# EAGLE board Daughter2 routed (EAGLE 9.6.2)
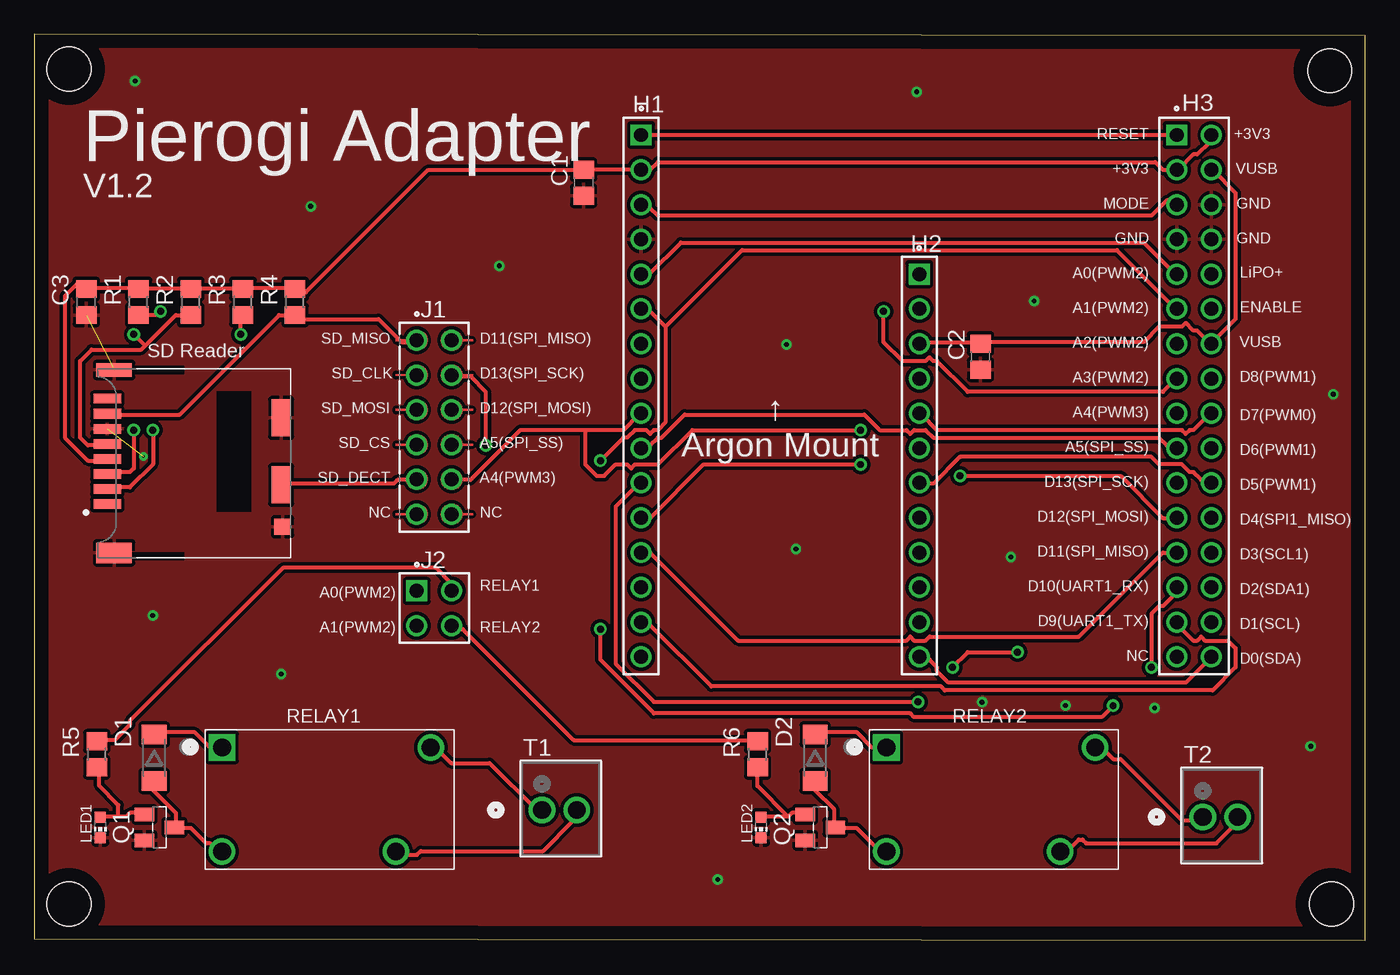
[diagram p0: board, top side]
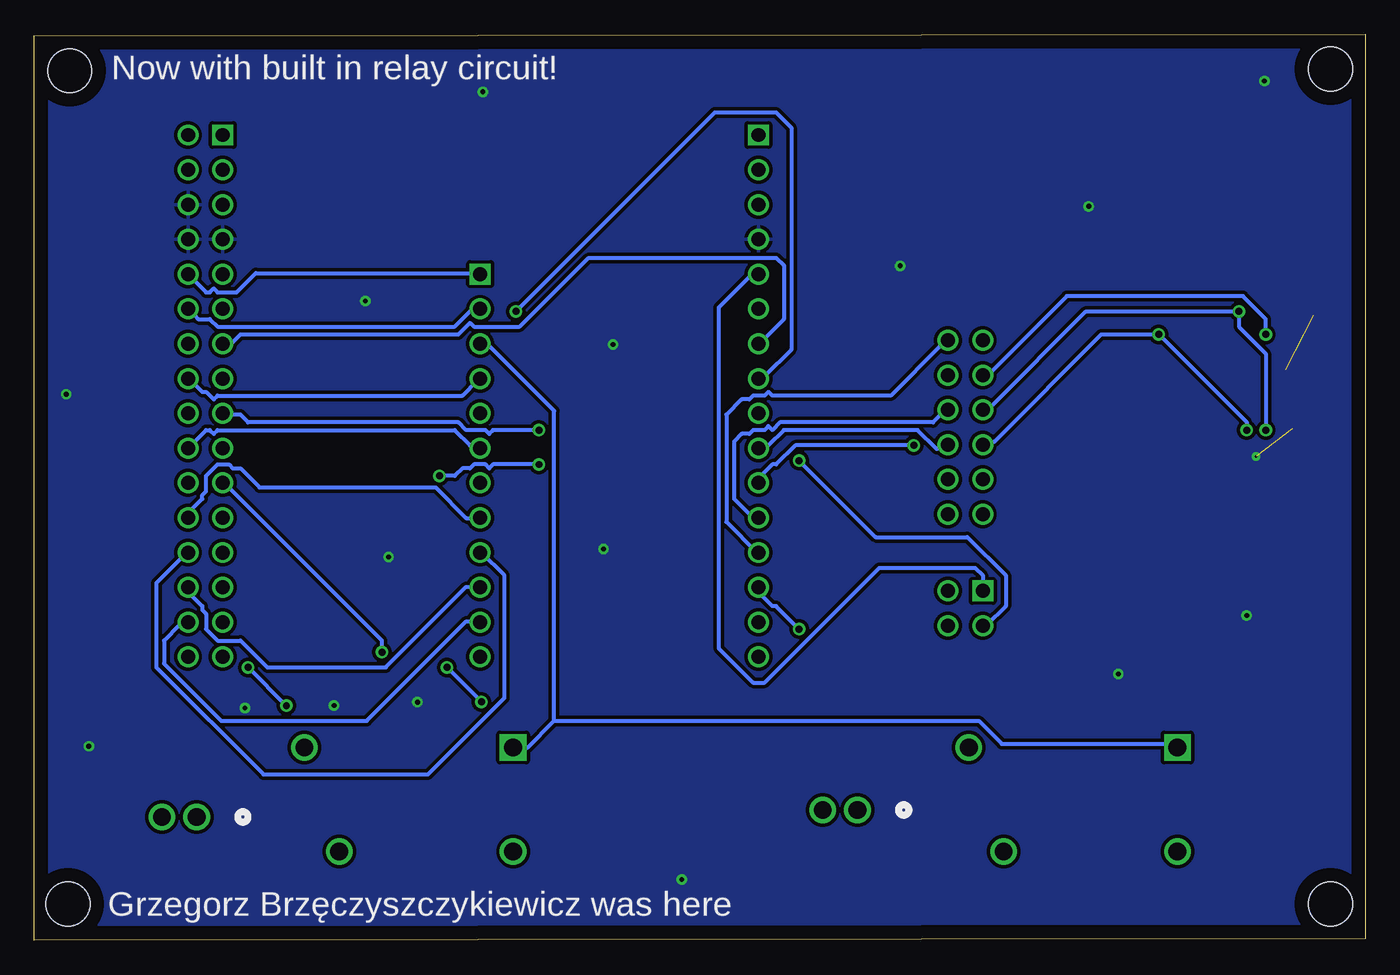
[diagram p1: board, bottom side, seen from below]

Size 97.21 x 66.16 mm. Coordinates in mm from the lower left corner, seen from the top.
Outline: 0,0.13 97.21,0 97.21,66.03 0,66.16 0,0.13
Copper layers (1*16): Top 0.035mm / dielectric 1.5mm / Bottom 0.035mm
Design rules "default": minimum track width 6mil, minimum drill 0.35mm, track to track 6mil, track to pad 6mil, pad to pad 6mil, via to via 6mil, smd to smd 6mil, copper to edge 40mil, drill to drill 6mil, minimum pad ring 10mil, minimum via ring 8mil, stop-mask expansion 4mil, vias tented up to drill 0mil, thermal gap 10mil
Net classes: 0 default: width 0.305 mm, drill 0.508 mm, clearance 0.254 mm
Holes 3.2 mm at 2.54,63.63 94.61,63.5 2.54,2.67 94.74,2.67

## Footprints (pad centres in the part's own frame; a part is rotated, then mirrored left to right if it is on the bottom)
C0805 = smd 1.3 x 1.5: 1 -0.95,0; 2 0.95,0
SOD80 = smd 1.4 x 1.8: 1 -1.7,0; 2 1.7,0
SAMTEC_DW-16-09-T-S-437-LL = drill 1.02 pad 1.37 square: 01 0,0 | drill 1.02 pad 1.37: 02 2.54,0; 03 5.08,0; 04 7.62,0; 05 10.16,0; 06 12.7,0; 07 15.24,0; 08 17.78,0; 09 20.32,0; 10 22.86,0; 11 25.4,0; 12 27.94,0; 13 30.48,0; 14 33.02,0; 15 35.56,0; 16 38.1,0
SAMTEC_DW-12-13-T-S-827 = drill 1.02 pad 1.37 square: 01 0,0 | drill 1.02 pad 1.37: 02 2.54,0; 03 5.08,0; 04 7.62,0; 05 10.16,0; 06 12.7,0; 07 15.24,0; 08 17.78,0; 09 20.32,0; 10 22.86,0; 11 25.4,0; 12 27.94,0
SAMTEC_ZW-16-07-T-D-200-100 = drill 1.02 pad 1.37 square: 01 0,0 | drill 1.02 pad 1.37: 02 0,2.54; 03 2.54,0; 04 2.54,2.54; 05 5.08,0; 06 5.08,2.54; 07 7.62,0; 08 7.62,2.54; 09 10.16,0; 10 10.16,2.54; 11 12.7,0; 12 12.7,2.54; 13 15.24,0; 14 15.24,2.54; 15 17.78,0; 16 17.78,2.54; 17 20.32,0; 18 20.32,2.54; 19 22.86,0; 20 22.86,2.54; 21 25.4,0; 22 25.4,2.54; 23 27.94,0; 24 27.94,2.54; 25 30.48,0; 26 30.48,2.54; 27 33.02,0; 28 33.02,2.54; 29 35.56,0; 30 35.56,2.54; 31 38.1,0; 32 38.1,2.54
SAMTEC_MTLW-106-22-G-D-380 = drill 1.02 pad 1.52: 01 -6.35,-1.27; 02 -6.35,1.27; 03 -3.81,-1.27; 04 -3.81,1.27; 05 -1.27,-1.27; 06 -1.27,1.27; 07 1.27,-1.27; 08 1.27,1.27; 09 3.81,-1.27; 10 3.81,1.27; 11 6.35,-1.27; 12 6.35,1.27
SAMTEC_MTSW-102-06-G-D-100 = drill 1.02 pad 1.37 square: 01 0,0 | drill 1.02 pad 1.37: 02 0,2.54; 03 2.54,0; 04 2.54,2.54
RELAY_OJE-SS-124HM,000 = drill 1.3 square: 1 -7.62,3.8 | drill 1.3: 2 7.62,3.8; 3 5.08,-3.8; 4 -7.62,-3.8
CHIP-LED0603 = smd 0.8 x 0.8: A 0,-0.75; C 0,0.75
SOT-23_BEC = smd 1 x 1.4: B -0.95,-1.1; C 0,1.1; E 0.95,-1.1
R0805 = smd 1.3 x 1.5: 1 -0.95,0; 2 0.95,0
HRS_DM3CS-SF = smd 0.7 x 2: 1 3.2,-6.35; 2 2.1,-6.35; 3 1,-6.35; 4 -0.1,-6.35; 5 -1.2,-6.35; 6 -2.3,-6.35; 7 -3.4,-6.35; 8 -4.5,-6.35 | smd 2.7 x 1.4: 9 1.8,6.35; S3 -3.1,6.35 | smd 1 x 2.6: S1 -6.6,-5.85 | smd 1.5 x 2.6: S2 6.75,-5.85 | smd 1.2 x 1.2: S5 4.85,6.45
CONN_OSTVN02A150_OST = drill 1.295 pad 1.803: 1 0,0; 2 2.54,0

## Placement (x,y rotation side)
C1  .1uF  [C0805]  40.13,55.32 270 top
C2  .1uF  [C0805]  69.11,42.62 270 top
C3  .1uF  [C0805]  3.81,46.61 270 top
D1  [SOD80]  8.76,13.34 270 top
D2  [SOD80]  57.02,13.34 270 top
H1  DW-16-09-T-S-437-LL  [SAMTEC_DW-16-09-T-S-437-LL]  44.32,58.8 270 top
H2  DW-12-13-T-S-827  [SAMTEC_DW-12-13-T-S-827]  64.64,48.64 270 top
H3  ZW-16-07-T-D-200-100  [SAMTEC_ZW-16-07-T-D-200-100]  83.44,58.8 270 top
J1  MTLW-106-22-G-D-380  [SAMTEC_MTLW-106-22-G-D-380]  29.21,37.47 270 top
J2  MTSW-102-06-G-D-100  [SAMTEC_MTSW-102-06-G-D-100]  27.94,25.53 270 top
K1  OJE-SS-124HM,000  [RELAY_OJE-SS-124HM,000]  21.34,10.29 0 top
K2  OJE-SS-124HM,000  [RELAY_OJE-SS-124HM,000]  69.85,10.29 0 top
LED1  [CHIP-LED0603]  4.83,8.26 180 top
LED2  [CHIP-LED0603]  53.09,8.26 180 top
Q1  SS8050  [SOT-23_BEC]  9.14,8.26 270 top
Q2  SS8050  [SOT-23_BEC]  57.4,8.26 270 top
R1  10K  [R0805]  7.62,46.61 90 top
R2  10K  [R0805]  11.43,46.61 90 top
R3  10K  [R0805]  15.24,46.61 90 top
R4  10K  [R0805]  19.05,46.61 90 top
R5  1K  [R0805]  4.57,13.59 90 top
R6  1K  [R0805]  52.83,13.59 90 top
SD1  DM3CS-SF  [HRS_DM3CS-SF]  11.68,35.05 270 top
T1  OSTVN02A150  [CONN_OSTVN02A150_OST]  37.08,9.53 0 top
T2  OSTVN02A150  [CONN_OSTVN02A150_OST]  85.34,9.02 0 top

## Library data of the parts
C1-C3 = rcl; SPICEPREFIX: C
D1 D2 = semicon-smd-ipc
H1 = DW-16-09-T-S-437-LL; AVAILABILITY: In Stock; DESCRIPTION: 16 Position Header Spacer Connector 0.100 (2.54mm) Tin Through Hole; MF: Samtec; MP: DW-16-09-T-S-437-LL; PACKAGE: None; PRICE: None; PURCHASE-URL: https://pricing.snapeda.com/search/part/DW-16-09-T-S-437-LL/?ref=eda
H2 = DW-12-13-T-S-827; AVAILABILITY: In Stock; DESCRIPTION: 12 Position Header Spacer Connector 0.100 (2.54mm) Tin Through Hole; MF: Samtec Inc.; MP: DW-12-13-T-S-827; PACKAGE: None; PRICE: None; PURCHASE-URL: https://pricing.snapeda.com/search/part/DW-12-13-T-S-827/?ref=eda
H3 = ZW-16-07-T-D-200-100; AVAILABILITY: In Stock; DESCRIPTION: 32 Position Header Spacer Connector 0.100 (2.54mm) Tin Through Hole; MF: Samtec Inc.; MP: ZW-16-07-T-D-200-100; PACKAGE: None; PRICE: None; PURCHASE-URL: https://pricing.snapeda.com/search/part/ZW-16-07-T-D-200-100/?ref=eda
J1 = MTLW-106-22-G-D-380; AVAILABILITY: In Stock; DESCRIPTION: CONN HEADER VERT 12POS 2.54MM; MF: Samtec; MP: MTLW-106-22-G-D-380; PACKAGE: None; PRICE: None; PURCHASE-URL: https://pricing.snapeda.com/search/part/MTLW-106-22-G-D-380/?ref=eda
J2 = MTSW-102-06-G-D-100; AVAILABILITY: In Stock; DESCRIPTION: Connector Header Through Hole 4 position 0.100 (2.54mm); MF: Samtec Inc.; MP: MTSW-102-06-G-D-100; PACKAGE: None; PRICE: None; PURCHASE-URL: https://pricing.snapeda.com/search/part/MTSW-102-06-G-D-100/?ref=eda
K1 K2 = OJE-SS-124HM_000; AVAILABILITY: In Stock; COMMENT: 6-1419128-4; DESCRIPTION: Electromechanical Relay 24VDC 1.28KOhm 10A SPST-NO( (18.2mm 10.2mm 14.7mm)) THT Miniature Relay; MF: TE Connectivity; MP: OJE-SS-124HM,000; PACKAGE: None; PRICE: None; PURCHASE-URL: https://pricing.snapeda.com/search/part/OJE-SS-124HM,000/?ref=eda
LED1 LED2 = led
Q1 Q2 = SS8050; AVAILABILITY: In Stock; DESCRIPTION: Bipolar (BJT) Transistor NPN 25V 1.5A 100MHz 625mW Surface Mount SOT-23; MF: Microdiode Electronics; MP: SS8050; PACKAGE: TO-236-3 Microdiode Electronics; PRICE: None; PURCHASE-URL: https://pricing.snapeda.com/search/part/SS8050/?ref=eda
R1-R6 = rcl; SPICEPREFIX: R
SD1 = DM3CS-SF; AVAILABILITY: In Stock; DESCRIPTION: 10 (8 + 2) Position Card Connector Secure Digital - microSD™ Surface Mount, Right Angle Gold; MF: Hirose; MP: DM3CS-SF; PACKAGE: None; PRICE: None; PURCHASE-URL: https://pricing.snapeda.com/search/part/DM3CS-SF/?ref=eda
T1 T2 = OSTVN02A150; COPYRIGHT: Copyright (C) 2022 Ultra Librarian. All rights reserved.; MANUFACTURER_PART_NUMBER: OSTVN02A150; MFR_NAME: On Shore Technology

## Nets
+3V3: C1.1 C3.1 H1.02 H3.02 H3.03 R1.2 R2.2 R3.2 R4.2 SD1.4
A0(PWM2): H1.05 H3.09 J2.01
A1(PWM2): H1.06 H3.11 J2.03
A2(PWM2): H1.07 H3.13
A3(PWM2): H1.08 H3.15
A4(PWM3): H1.09 H3.17 J1.10
A5(SPI_SS): H1.10 H3.19 J1.08
D0(SDA): H2.12 H3.32
D1(SCL): H2.11 H3.30
D2(SDA1): H2.10 H3.28
D3(SCL1): H2.09 H3.26
D4(SPI1_MISO): H2.08 H3.24
D5(PWM1): H2.07 H3.22
D6(PWM1): H2.06 H3.20
D7(PWM0): H2.05 H3.18
D8(PWM1): H2.04 H3.16
D9(UART1_TX): H1.15 H3.29
D10(UART1_RX): H1.14 H3.27
D11(SPI_MISO): H1.13 H3.25 J1.02
D12(SPI_MOSI): H1.12 H3.23 J1.06
D13(SPI_SCK): H1.11 H3.21 J1.04
ENABLE: H2.02 H3.12
GND: C1.2 C2.2 C3.2 H1.04 H3.06 H3.07 H3.08 LED1.C LED2.C Q1.E Q2.E SD1.6 SD1.S1 SD1.S2 SD1.S3 SD1.S5
LIPO+: H2.01 H3.10
MODE: H1.03 H3.05
RELAY1IN: J2.02 R5.2
RELAY1OUT1: K1.2 T1.1
RELAY1OUT2: K1.3 T1.2
RELAY1R: LED1.A Q1.B R5.1
RELAY1T: D1.2 K1.4 Q1.C
RELAY2IN: J2.04 R6.2
RELAY2OUT1: K2.2 T2.1
RELAY2OUT2: K2.3 T2.2
RELAY2R: LED2.A Q2.B R6.1
RELAY2T: D2.2 K2.4 Q2.C
RESET: H1.01 H3.01
SD_CLK: J1.03 R2.1 SD1.5
SD_CS: J1.07 R3.1 SD1.2
SD_DECT: J1.09 SD1.9
SD_MISO: J1.01 R4.1 SD1.7
SD_MOSI: J1.05 R1.1 SD1.3
VBUS: C2.1 D1.1 D2.1 H2.03 H3.04 H3.14 K1.1 K2.1

## Tracks (layer width: path | path; a pad name or v marks a point on that pad's centre or on a via)
+3V3
  Top 0.305: H3.02 85.78,58.78 85.78,58.22 84.94,57.38 84.66,57.38 83.54,56.26 H3.03 82.42,56.26 81.86,56.82 45.54,56.82 44.98,56.26 H1.02 40.23,56.26 C1.1 39.95,56.26 28.78,56.26 19.84,47.32 19.28,47.32 R4.2 19,47.6 15.37,47.6 R3.2 15.09,47.6 11.46,47.6 R2.2 11.18,47.6 7.82,47.6 R1.2 7.54,47.6 3.91,47.6 C3.1 3.63,47.6 3.35,47.88 3.07,47.88 2.23,47.04 2.23,36.7 3.91,35.03 5.31,35.03 SD1.4
A0(PWM2)
  Top 0.305: H3.09 83.26,48.72 81.03,50.95 47.22,50.95 44.98,48.72 44.42,48.72 H1.05
  Bottom 0.305: J2.01 27.94,26.64 28.5,27.2 35.48,27.2 43.87,18.82 44.7,18.82 47.22,21.34 47.22,46.2 44.98,48.44 44.42,48.44 H1.05
A1(PWM2)  (via drill 0.51)
  Top 0.305: v41.35,35.03 43.03,36.7 43.31,36.7 43.87,37.26 44.7,37.26 44.98,36.98 45.26,37.26 45.54,37.26 46.1,37.82 46.1,44.81 | 46.1,44.81 44.98,45.92 44.42,45.92 H1.06 | 46.1,44.81 51.69,50.39 79.07,50.39 83.26,46.2 H3.11
  Bottom 0.305: v41.35,35.03 35.76,29.44 29.06,29.44 26.26,26.64 26.26,24.41 27.66,23.01 27.94,23.01 J2.03
A2(PWM2)
  Bottom 0.305: H1.07 44.15,43.69 42.47,45.36 42.47,49.28 43.03,49.84 56.72,49.84 61.75,44.81 65.1,44.81 65.38,45.09 66.22,44.25 82.14,44.25 82.7,43.69 83.26,43.69 H3.13
A3(PWM2)  (via drill 0.51)
  Top 0.305: v62.03,45.92 62.03,43.69 63.42,42.29 65.1,42.29 65.38,42.57 65.66,42.29 65.94,42.29 68.17,40.06 82.42,40.06 83.26,40.89 H3.15
  Bottom 0.305: v62.03,45.92 47.5,60.45 43.03,60.45 41.91,59.33 41.91,43.13 43.87,41.17 44.15,41.17 H1.08
A4(PWM3)  (via drill 0.51)
  Top 0.305: 40.23,37.26 43.03,37.26 44.15,38.38 H1.09 | 40.23,37.26 35.48,37.26 31.85,33.63 30.73,33.63 J1.10 | v60.35,37.26 48.06,37.26 45.54,34.75 43.87,34.75 43.59,34.47 43.31,34.75 42.47,34.75 41.63,33.91 41.07,33.91 40.23,34.75 40.23,37.26
  Bottom 0.305: v60.35,37.26 63.7,37.26 63.98,36.98 64.26,37.26 65.66,37.26 66.22,37.82 81.58,37.82 82.14,38.38 83.26,38.38 H3.17
A5(SPI_SS)
  Top 0.305: H3.19 83.26,36.14 82.7,36.14 82.14,36.7 65.66,36.7 65.1,37.26 64.26,37.26 63.98,36.98 63.7,37.26 61.75,37.26 60.63,38.38 47.5,38.38 45.82,36.7 45.54,36.7 44.98,36.14 44.42,36.14 H1.10
  Bottom 0.305: H1.10 44.15,36.14 43.59,36.14 42.47,37.26 32.69,37.26 31.29,35.86 30.73,36.42 J1.08
D0(SDA)
  Top 0.305: H2.12 64.82,20.5 65.38,20.5 65.94,19.94 65.94,19.66 66.78,18.82 84.1,18.82 85.5,20.22 85.5,20.5 85.78,20.78 H3.32
D1(SCL)
  Bottom 0.305: H2.11 64.82,23.29 65.66,23.29 72.92,16.03 83.54,16.03 87.73,20.22 87.73,21.89 86.61,23.01 86.06,23.01 H3.30
D2(SDA1)
  Bottom 0.305: H2.10 64.82,25.81 65.66,25.81 71.53,19.94 80.19,19.94 82.14,21.89 83.82,21.89 84.66,22.73 84.66,23.85 84.94,24.13 84.94,24.41 86.06,25.53 H3.28
D3(SCL1)
  Bottom 0.305: H2.09 64.54,28.32 62.87,26.64 62.87,17.7 68.45,12.12 80.47,12.12 88.29,19.94 88.29,26.09 86.06,28.32 H3.26
D4(SPI1_MISO)
  Bottom 0.305: H2.08 64.82,30.84 65.66,30.84 67.89,33.07 80.75,33.07 82.14,34.47 82.7,34.47 82.98,34.75 83.82,34.75 84.66,33.91 84.66,32.79 84.94,32.51 84.94,32.23 86.06,31.11 H3.24
D5(PWM1)
  Top 0.305: H2.07 64.82,33.35 65.66,33.35 67.61,35.31 81.58,35.31 82.14,34.75 83.82,34.75 84.38,34.19 84.66,34.19 85.22,33.63 85.78,33.63 H3.22
D6(PWM1)
  Bottom 0.305: H2.06 64.82,36.14 65.38,36.14 66.5,37.26 83.82,37.26 84.1,36.98 84.38,37.26 84.66,37.26 85.5,36.42 85.78,36.42 86.06,36.14 H3.20
D7(PWM0)
  Top 0.305: H2.05 64.82,38.38 65.94,37.26 83.82,37.26 84.1,36.98 84.38,37.26 84.66,37.26 85.78,38.38 H3.18
D8(PWM1)
  Bottom 0.305: H2.04 64.82,40.89 65.94,39.78 83.82,39.78 84.1,39.5 84.66,40.06 84.94,40.06 85.5,40.61 85.5,40.89 85.78,41.17 H3.16
D9(UART1_TX)
  Top 0.305: H1.15 44.42,23.01 44.98,23.01 49.45,18.54 66.22,18.54 66.5,18.26 86.06,18.26 87.73,19.94 87.73,21.34 87.17,21.89 85.5,21.89 85.22,22.17 84.94,21.89 84.66,21.89 83.82,22.73 83.54,22.73 83.26,23.01 H3.29
D10(UART1_RX)  (via drill 0.51)
  Top 0.305: v41.35,22.73 41.35,20.5 45.26,16.59 63.98,16.59 64.26,16.31 77.95,16.31 v78.79,17.14 | v81.58,19.94 81.58,23.85 82.14,24.41 82.42,24.41 83.54,25.53 H3.27
  Bottom 0.305: v41.35,22.73 43.03,24.41 43.31,24.41 44.15,25.25 44.15,25.53 H1.14 | v81.58,19.94 v78.79,17.14
D11(SPI_MISO)
  Top 0.305: H3.25 82.42,28.32 76.28,22.17 65.38,22.17 65.1,21.89 64.26,21.89 63.98,22.17 63.7,21.89 51.41,21.89 44.98,28.32 H1.13
  Bottom 0.305: H1.13 44.42,28.32 46.66,30.56 46.66,38.38 45.54,39.5 44.98,39.5 44.7,39.78 43.87,39.78 43.59,40.06 43.31,39.78 34.65,39.78 31.01,43.41 30.73,43.41 30.45,43.69 J1.02
D12(SPI_MOSI)  (via drill 0.51)
  Top 0.305: v67.61,33.91 79.35,33.91 82.42,30.84 83.26,30.84 H3.23 | v60.35,34.75 48.9,34.75 44.98,30.84 44.42,30.84 H1.12
  Bottom 0.305: H1.12 44.42,31.11 44.98,31.11 46.1,32.23 46.1,36.42 45.54,36.98 44.98,36.98 44.7,37.26 43.87,37.26 43.59,37.54 43.31,37.26 42.75,37.82 31.57,37.82 31.01,38.38 30.73,38.38 30.45,38.66 J1.06 | v67.61,33.91 66.5,33.91 65.94,34.47 65.38,34.47 65.1,34.75 64.26,34.75 63.98,34.47 63.7,34.75 v60.35,34.75
D13(SPI_SCK)  (via drill 0.51)
  Top 0.305: v32.97,36.14 32.97,40.06 31.85,41.17 30.73,41.17 J1.04 | v71.81,21.06 68.17,21.06 v67.06,19.94 | v64.54,17.42 45.26,17.42 42.47,20.22 42.47,31.67 44.15,33.35 H1.11
  Bottom 0.305: v32.97,36.14 41.63,36.14 43.03,34.75 43.31,34.75 44.15,33.91 44.15,33.63 H1.11 | v71.81,21.06 71.81,21.89 83.26,33.35 H3.21 | v64.54,17.42 v67.06,19.94
ENABLE
  Bottom 0.305: H2.02 64.82,45.92 65.38,45.92 66.5,44.81 83.82,44.81 84.38,45.36 85.22,45.36 85.5,45.64 85.5,45.92 85.78,46.2 H3.12
GND  (via drill 0.2, 0.35)  (2 unrouted)
  Top 0.305: 75.44,17.14 v75.31,17.14
  other vias: 7.37,62.74 20.19,53.59 64.44,61.95 94.87,39.88 49.91,4.45 69.22,17.4 7.98,35.33 81.81,16.97 33.96,49.25 8.66,23.72 18.03,19.46 93.22,14.17 71.32,27.99 55.63,28.57 54.94,43.51 73.03,46.69
  pour Top: 0,67.44 97.79,67.44 97.79,-1.14 -1.27,-1.14 -1.27,67.44
  pour Bottom: -1.27,68.71 99.06,68.71 99.06,-2.41 -2.54,-2.41 -2.54,68.71
LIPO+
  Bottom 0.305: H2.01 64.82,48.72 81.03,48.72 82.42,47.32 83.82,47.32 84.1,47.6 84.38,47.32 84.66,47.32 85.5,48.16 85.5,48.44 85.78,48.72 H3.10
MODE
  Top 0.305: H1.03 44.42,53.47 44.98,53.47 45.54,52.91 81.58,52.91 82.7,54.03 82.98,54.03 83.26,53.75 H3.05
RELAY1IN
  Top 0.305: R5.2 4.75,14.63 5.87,14.63 6.99,15.75 6.99,16.03 18.16,27.2 29.34,27.2 30.45,26.09 30.45,25.53 J2.02
RELAY1OUT1
  Top 0.305: T1.1 36.88,9.6 36.6,9.6 33.25,12.95 30.45,12.95 29.06,14.35 K1.2
RELAY1OUT2
  Top 0.305: T1.2 39.4,9.32 39.4,8.76 37.16,6.53 28.22,6.53 27.94,6.25 26.54,6.25 K1.3
RELAY1R
  Top 0.305: 6.15,9.04 6.71,9.04 6.99,9.32 7.82,9.32 Q1.B | 6.15,9.04 5.03,9.04 LED1.A | 6.15,9.04 6.15,9.88 4.75,11.28 4.75,12.39 R5.1
RELAY1T
  Top 0.305: D1.2 8.66,11.56 8.66,11 10.34,9.32 10.34,8.48 Q1.C 10.34,8.2 11.46,8.2 12.57,7.09 12.85,7.09 13.69,6.25 K1.4
RELAY2IN
  Top 0.305: R6.2 52.81,14.63 39.4,14.63 31.29,22.73 30.73,22.73 J2.04
RELAY2OUT1
  Top 0.305: T2.1 85.22,8.76 83.82,8.76 79.35,13.23 78.79,13.23 77.67,14.35 K2.2
RELAY2OUT2
  Top 0.305: T2.2 87.73,8.76 87.73,8.48 86.33,7.09 76.83,7.09 76.56,7.37 76.28,7.37 75.16,6.25 K2.3
RELAY2R
  Top 0.305: 55.04,9.04 53.09,9.04 LED2.A | 55.04,9.04 55.32,9.32 56.16,9.32 Q2.B | 55.04,9.04 52.81,11.28 52.81,12.39 R6.1
RELAY2T
  Top 0.305: D2.2 57,11.56 57,11 58.4,9.6 58.4,8.48 Q2.C 58.67,8.2 60.07,8.2 62.03,6.25 K2.4
RESET
  Top 0.305: H1.01 44.42,58.78 83.26,58.78 H3.01
SD_CLK  (via drill 0.51)
  Top 0.305: 8.1,43.41 7.82,43.13 4.19,43.13 3.35,42.29 3.35,36.7 3.91,36.14 5.31,36.14 SD1.5 | 8.1,43.41 10.34,45.64 11.18,45.64 R2.1 | 8.1,43.41 v7.26,44.25
  Bottom 0.305: v7.26,44.25 7.26,45.36 8.94,47.04 21.79,47.04 27.38,41.45 27.94,41.45 J1.03
SD_CS  (via drill 0.51)
  Top 0.305: v15.09,44.25 15.09,45.64 R3.1 | v8.66,37.26 8.69,37.24 8.69,34.77 6.99,33.07 5.59,33.07 SD1.2
  Bottom 0.305: J1.07 27.94,36.42 27.1,36.42 19.28,44.25 v15.09,44.25 8.66,37.82 v8.66,37.26
SD_DECT
  Top 0.305: SD1.9 18.16,33.35 26.26,33.35 26.54,33.63 27.94,33.63 J1.09
SD_MISO
  Top 0.305: SD1.7 5.59,38.38 10.62,38.38 17.88,45.64 19,45.64 R4.1 19.28,45.64 19.56,45.36 25.15,45.36 26.82,43.69 27.94,43.69 J1.01
SD_MOSI  (via drill 0.51)
  Top 0.305: v9.22,45.92 8.94,45.64 7.82,45.64 R1.1 | v7.26,37.26 7.26,34.47 6.99,34.19 5.59,34.19 SD1.3
  Bottom 0.305: J1.05 27.94,38.94 27.38,38.94 20.4,45.92 v9.22,45.92 9.22,44.81 7.26,42.85 v7.26,37.26
VBUS
  Top 0.305: H2.03 64.82,43.69 69.01,43.69 C2.1 69.29,43.69 81.03,43.69 82.14,44.81 83.82,44.81 84.1,45.09 84.66,44.53 84.94,44.53 85.5,43.97 86.33,43.97 | 86.33,43.97 87.73,45.36 87.73,54.59 86.06,56.26 H3.04 | 86.33,43.97 86.06,43.69 H3.14 86.33,43.97 | D1.1 8.94,15.19 11.73,15.19 12.85,14.07 13.69,14.07 K1.1 | D2.1 57.28,15.19 60.07,15.19 61.19,14.07 62.03,14.07 K2.1
  Bottom 0.305: 59.23,16.03 28.22,16.03 26.54,14.35 13.97,14.35 K1.1 | 59.23,16.03 61.19,14.07 62.03,14.07 K2.1 | 59.23,16.03 59.23,38.66 63.98,43.41 64.54,43.41 H2.03

## Text on the board
tNames: RESET | +3V3 | +3V3 | VUSB | V1.2 | MODE | GND | Pierogi Adapter | GND | GND | A0(PWM2) | LiPO+ | A1(PWM2) | ENABLE | SD_MISO | D11(SPI_MISO) | A2(PWM2) | VUSB | SD Reader | A3(PWM2) | SD_CLK | D13(SPI_SCK) | D8(PWM1) | SD_MOSI | D12(SPI_MOSI) | A4(PWM3) | D7(PWM0) | A5(SPI_SS) | SD_CS | A5(SPI_SS) | ↑ / Argon Mount | D6(PWM1) | SD_DECT | A4(PWM3) | D13(SPI_SCK) | D5(PWM1) | D12(SPI_MOSI) | NC | NC | D4(SPI1_MISO) | D11(SPI_MISO) | D3(SCL1) | D10(UART1_RX) | RELAY1 | D2(SDA1) | A0(PWM2) | D9(UART1_TX) | A1(PWM2) | RELAY2 | D1(SCL) | NC | D0(SDA) | RELAY1 | RELAY2
bNames: Now with built in relay circuit! | Grzegorz Brzęczyszczykiewicz was here